# Altium PCB PCB1.PcbDoc
Units mm, origin at the board's own origin, x right, y up, seen from the top; angles counter-clockwise.
Board outline 100.84 x 68.96 mm, 2 copper layers (Top Layer, Bottom Layer); 67 components, 62 nets, 324 pads, 94 vias.
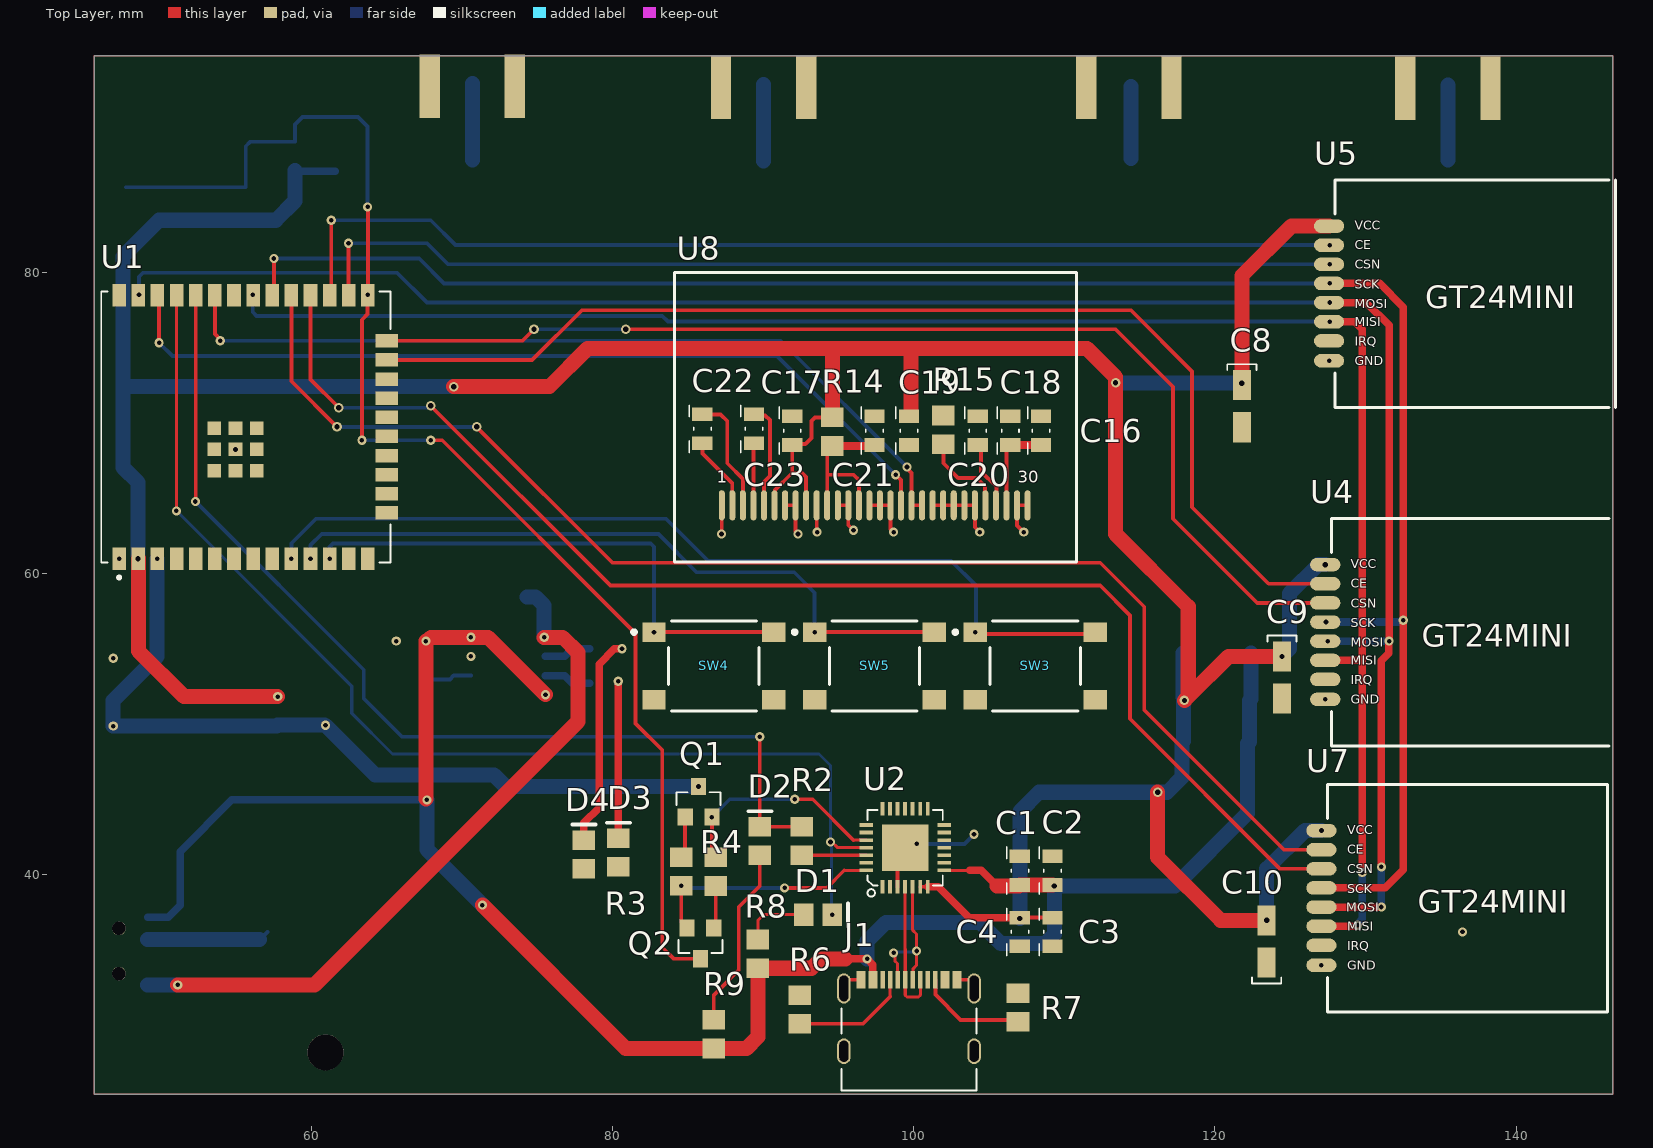
[diagram p0: Top Layer view]
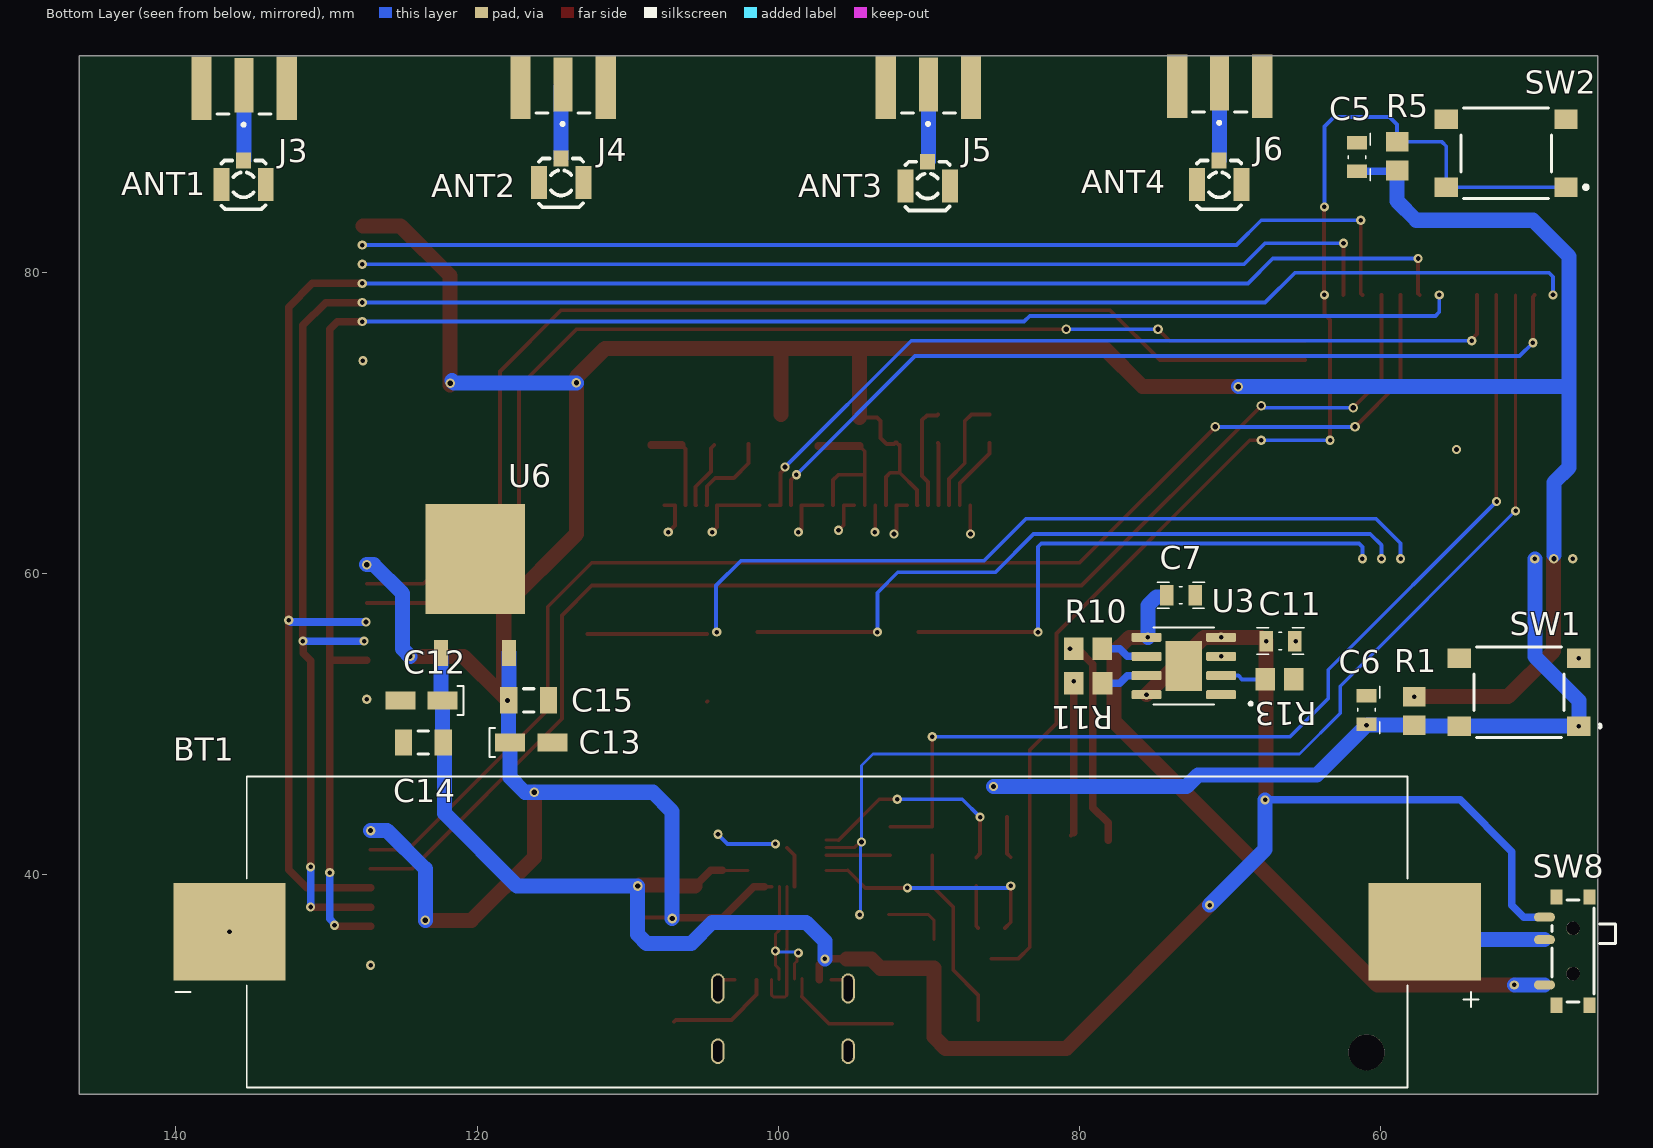
[diagram p1: Bottom Layer view, seen from below]

## Layer stack, top to bottom
Top Solder: solder mask 0.0102, Solder Resist, Dk 3.5
Top Layer: signal copper 0.0356
Dielectric 1: dielectric 0.32, FR-4, Dk 4.8
Bottom Layer: signal copper 0.0356
Bottom Solder: solder mask 0.0102, Solder Resist, Dk 3.5

## Board outline
146.431,94.361 146.431,25.4 45.593,25.4 45.593,94.361

## Design rules (kind name [scope] priority, off if disabled: settings)
AssemblyTestPointUsage [All] p0: scope1count=1 scope1_0_kind=Board scope1_0_value=Board scope2count=1 scope2_0_kind=Board scope2_0_value=Board commentlength=0
AssemblyTestpoint [All] p0: scope1count=1 scope1_0_kind=Board scope1_0_value=Board scope2count=1 scope2_0_kind=Board scope2_0_value=Board commentlength=0
Clearance [All] p0: scope1count=1 scope1_0_kind=Board scope1_0_value=Board scope2count=1 scope2_0_kind=Board scope2_0_value=Board commentlength=0 gap=0.254
Clearance [All] p1: gap=0.254 ignorepadtopadclearanceinfootprint=FALSE except(0.127: Arc-Arc Arc-Track Arc-SMDPad Arc-THPad Arc-Via Track-Track Track-SMDPad Track-THPad Track-Via SMDPad-SMDPad SMDPad-THPad SMDPad-Via THPad-THPad THPad-Via Via-Via)
ComponentClearance [All] p0: scope1count=1 scope1_0_kind=Board scope1_0_value=Board scope2count=1 scope2_0_kind=Board scope2_0_value=Board commentlength=0 gap=0.254 collisioncheckmode=3
DiffPairsRouting [All] p0: scope1count=1 scope1_0_kind=Board scope1_0_value=Board scope2count=1 scope2_0_kind=Board scope2_0_value=Board commentlength=0
FabricationTestPointUsage [All] p0: scope1count=1 scope1_0_kind=Board scope1_0_value=Board scope2count=1 scope2_0_kind=Board scope2_0_value=Board commentlength=0 valid=0 allowmultiple=FALSE
FabricationTestpoint [All] p0: scope1count=1 scope1_0_kind=Board scope1_0_value=Board scope2count=1 scope2_0_kind=Board scope2_0_value=Board commentlength=0 side=3 testpointundercomponent=TRUE minsize=1.016 maxsize=2.54 preferedsize=1.524 minholesize=0 maxholesize=1.016 preferedholesize=0.813 testpointgrid=0.025
FanoutControl Fanout_BGA [All] p0 off: scope1count=1 scope1_0_kind=Board scope1_0_value=Board scope2count=1 scope2_0_kind=Board scope2_0_value=Board commentlength=69 // Protel DXP Scope 1 Expression Was: IsBGA   Fanout_BGA (Default Rule)
FanoutControl Fanout_LCC [All] p0 off: scope1count=1 scope1_0_kind=Board scope1_0_value=Board scope2count=1 scope2_0_kind=Board scope2_0_value=Board commentlength=69 // Protel DXP Scope 1 Expression Was: IsLCC   Fanout_LCC (Default Rule)
FanoutControl Fanout_SOIC [All] p0 off: scope1count=1 scope1_0_kind=Board scope1_0_value=Board scope2count=1 scope2_0_kind=Board scope2_0_value=Board commentlength=71 // Protel DXP Scope 1 Expression Was: IsSOIC   Fanout_SOIC (Default Rule)
FanoutControl Fanout_Small [All] p0 off: scope1count=1 scope1_0_kind=Board scope1_0_value=Board scope2count=1 scope2_0_kind=Board scope2_0_value=Board commentlength=84 // Protel DXP Scope 1 Expression Was: (CompPinCount < 5)   Fanout_Small (Default Rule)
FanoutControl Fanout_Default [All] p0: scope1count=1 scope1_0_kind=Board scope1_0_value=Board scope2count=1 scope2_0_kind=Board scope2_0_value=Board commentlength=30 // Fanout_Default (Default Rule)
Height [All] p0: scope1count=1 scope1_0_kind=Board scope1_0_value=Board scope2count=1 scope2_0_kind=Board scope2_0_value=Board commentlength=0
HoleSize [All] p0: scope1count=1 scope1_0_kind=Board scope1_0_value=Board scope2count=1 scope2_0_kind=Board scope2_0_value=Board commentlength=0 absolutevalues=TRUE maxlimit=2.54 minlimit=0.025 maxpercent=80.000 minpercent=20.000
HoleToHoleClearance [All] p0: scope1count=1 scope1_0_kind=Board scope1_0_value=Board scope2count=1 scope2_0_kind=Board scope2_0_value=Board commentlength=0
LayerPairs [All] p0: scope1count=1 scope1_0_kind=Board scope1_0_value=Board scope2count=1 scope2_0_kind=Board scope2_0_value=Board commentlength=0 enforce=TRUE
MinimumSolderMaskSliver [All] p0: scope1count=1 scope1_0_kind=Board scope1_0_value=Board scope2count=1 scope2_0_kind=Board scope2_0_value=Board commentlength=0
MinimumSolderMaskSliver [All] p1: minsoldermaskwidth=0.15
NetAntennae [All] p0: scope1count=1 scope1_0_kind=Board scope1_0_value=Board scope2count=1 scope2_0_kind=Board scope2_0_value=Board commentlength=0
PasteMaskExpansion [All] p0: scope1count=1 scope1_0_kind=Board scope1_0_value=Board scope2count=1 scope2_0_kind=Board scope2_0_value=Board commentlength=0 expansion=0
PlaneClearance [All] p0: scope1count=1 scope1_0_kind=Board scope1_0_value=Board scope2count=1 scope2_0_kind=Board scope2_0_value=Board commentlength=0 clearance=0.508
PlaneConnect [All] p0: scope1count=1 scope1_0_kind=Board scope1_0_value=Board scope2count=1 scope2_0_kind=Board scope2_0_value=Board commentlength=0 planeconnectstyle=Relief reliefexpansion=0.508 reliefentries=4 reliefconductorwidth=0.254 reliefairgap=0.254
PolygonConnect [All] p0: scope1count=1 scope1_0_kind=Board scope1_0_value=Board scope2count=1 scope2_0_kind=Board scope2_0_value=Board commentlength=0 connectstyle=Relief reliefconductorwidth=0.254 reliefentries=4 polygonreliefangle="90 Angle"
PolygonConnect [All] p1: connectstyle=Relief reliefconductorwidth=0.254 reliefentries=4 polygonreliefangle="90 Angle" airgapwidth=0.254
RoutingCorners [All] p0: scope1count=1 scope1_0_kind=Board scope1_0_value=Board scope2count=1 scope2_0_kind=Board scope2_0_value=Board commentlength=0 cornerstyle=45-Degree minsetback=2.54 maxsetback=2.54
RoutingLayers [All] p0: scope1count=1 scope1_0_kind=Board scope1_0_value=Board scope2count=1 scope2_0_kind=Board scope2_0_value=Board commentlength=0 top layer=Automatic bottom layer=Automatic
RoutingPriority [All] p0: scope1count=1 scope1_0_kind=Board scope1_0_value=Board scope2count=1 scope2_0_kind=Board scope2_0_value=Board commentlength=0
RoutingTopology [All] p0: scope1count=1 scope1_0_kind=Board scope1_0_value=Board scope2count=1 scope2_0_kind=Board scope2_0_value=Board commentlength=0 topology=Shortest
RoutingVias [All] p0: scope1count=1 scope1_0_kind=Board scope1_0_value=Board scope2count=1 scope2_0_kind=Board scope2_0_value=Board commentlength=0 holewidth=0.711 width=1.27 viastyle="Through Hole" minholewidth=0.711 minwidth=1.27 maxholewidth=0.711 maxwidth=1.27
RoutingVias [All] p1: holewidth=0.711 width=1.27 viastyle="Through Hole" minholewidth=0.711 minwidth=1.27 maxholewidth=0.711 maxwidth=1.27
ShortCircuit [All] p0: scope1count=1 scope1_0_kind=Board scope1_0_value=Board scope2count=1 scope2_0_kind=Board scope2_0_value=Board commentlength=0 allowed=FALSE
SilkToBoardRegionClearance [All] p0: scope1count=1 scope1_0_kind=Board scope1_0_value=Board scope2count=1 scope2_0_kind=Board scope2_0_value=Board commentlength=0
SilkToSilkClearance [All] p0: scope1count=1 scope1_0_kind=Board scope1_0_value=Board scope2count=1 scope2_0_kind=Board scope2_0_value=Board commentlength=0
SilkToSilkClearance [All] p1: silktosilkclearance=0.15
SilkToSolderMaskClearance [All] p0 off: scope1count=1 scope1_0_kind=Board scope1_0_value=Board scope2count=1 scope2_0_kind=Board scope2_0_value=Board commentlength=44 // Protel DXP Scope 1 Expression Was: IsPad
SilkToSolderMaskClearance [IsPad] p1: minsilkscreentomaskgap=0.15 clearancetoexposedcopper=TRUE
SolderMaskExpansion [All] p0: scope1count=1 scope1_0_kind=Board scope1_0_value=Board scope2count=1 scope2_0_kind=Board scope2_0_value=Board commentlength=0 expansion=0
SolderMaskExpansion [All] p1: expansion=0 istentingtop=FALSE
SupplyNets "Schematic Supply Nets_2" [All] p0: scope1count=1 scope1_0_kind=Net scope1_0_value=3V3 scope2count=1 scope2_0_kind=Board scope2_0_value=Board commentlength=0 voltage=0.000
SupplyNets "Schematic Supply Nets_1" [All] p0: scope1count=1 scope1_0_kind=Net scope1_0_value=GND scope2count=1 scope2_0_kind=Board scope2_0_value=Board commentlength=0 voltage=0.000
SupplyNets "Schematic Supply Nets" [All] p0: scope1count=1 scope1_0_kind=Net scope1_0_value=+5 scope2count=1 scope2_0_kind=Board scope2_0_value=Board commentlength=0 voltage=0.000
SupplyNets "Schematic Supply Nets_2" [InNet('3V3')] p1: voltage=0.000
SupplyNets "Schematic Supply Nets_1" [InNet('GND')] p2: voltage=0.000
SupplyNets "Schematic Supply Nets" [InNet('+5')] p3: voltage=0.000
UnRoutedNet [All] p0: scope1count=1 scope1_0_kind=Board scope1_0_value=Board scope2count=1 scope2_0_kind=Board scope2_0_value=Board commentlength=0
UnpouredPolygon [All] p0: scope1count=1 scope1_0_kind=Board scope1_0_value=Board scope2count=1 scope2_0_kind=Board scope2_0_value=Board commentlength=0
Width Width_2 [All] p0: scope1count=1 scope1_0_kind=Board scope1_0_value=Board scope2count=1 scope2_0_kind=Board scope2_0_value=Board commentlength=0 maxlimit=1 minlimit=0.2 preferedwidth=0.254
Width Width_1 [All] p0: scope1count=1 scope1_0_kind=Net scope1_0_value=+3V3 scope2count=1 scope2_0_kind=Board scope2_0_value=Board commentlength=0 maxlimit=1 minlimit=0.2 preferedwidth=1
Width [All] p0: scope1count=1 scope1_0_kind=Board scope1_0_value=Board scope2count=1 scope2_0_kind=Board scope2_0_value=Board commentlength=0 maxlimit=1 minlimit=0.2 preferedwidth=0.5
Width Width_2 [All] p1: maxlimit=1 minlimit=0.2 preferedwidth=0.254 minimp=50.000000 maximp=50.000000 favimp=50.000000
Width Width_1 [InNet('+3V3')] p2: maxlimit=1 minlimit=0.2 preferedwidth=1 minimp=50.000000 maximp=50.000000 favimp=50.000000
Width [All] p3: maxlimit=1 minlimit=0.2 preferedwidth=0.5 minimp=50.000000 maximp=50.000000 favimp=50.000000
27 further rules are at their usual default settings.

## Classes and differential pairs
component class Sheet2: C16 C17 C18 C19 C20 C21 C22 C23 R14 R15 U8
component class Sheet1: ANT1 ANT2 ANT3 ANT4 BT1 C1 C2 C3 C4 C5 C6 C7 C8 C9 C10 C11 C12 C13 C14 C15 D1 D2 D3 D4 J1 J3 J4 J5 J6 Q1 Q2 R1 R2 R3 R4 R5 R6 R7 R8 R9 R10 R11 R13 SW1 SW2 SW3 SW4 SW5 SW8 U1 U2 U3 U4 U5 U6 U7

## Components (designator, comment, footprint, x,y, rotation, side; value= is the part's Value field where it differs from the comment)
ANT1 "" "U.FL SMD" 135.509,86.614 r0 bottom
ANT2 "ANT" "U.FL SMD" 114.427,86.741 r0 bottom
ANT3 "ANT" "U.FL SMD" 90.092,86.525 r0 bottom
ANT4 "ANT" "U.FL SMD" 70.739,86.614 r0 bottom
BT1 "1042 Bat" BAT_1042 96.774,36.195 r180 bottom
C1 "10uF" CAP0805 107.061,40.259 r270 top
C2 "100nF, 50V" CAP0805 109.22,40.259 r270 top
C3 "10uF" CAP0805 109.22,36.195 r90 top
C4 "100nF, 50V" CAP0805 107.061,36.195 r90 top
C5 "100nF, 50V" CAP0805 61.595,87.63 r270 bottom
C6 "100nF, 50V" CAP0805 60.96,50.927 r270 bottom
C7 "100nF, 50V" CAP0805 73.279,58.547 r0 bottom
C8 "10uF" "TAN 1206 (3216X18L) SIZE A" 116.332,77.834 r270 top
C9 "10uF" "TAN 1206 (3216X18L) SIZE A" 118.999,59.817 r270 top
C10 "10uF" "TAN 1206 (3216X18L) SIZE A" 128.905,28.829 r90 top
C11 "100nF" CAP0805 66.675,55.499 r0 bottom
C12 "2.2uF" "TAN 1206 (3216X18L) SIZE A" 116.961,57.023 r0 bottom
C13 "2.2uF" "TAN 1206 (3216X18L) SIZE A" 123.146,43.307 r180 bottom
C14 "10uF, 50V" "CAP 1206 (3216X15L)" 123.571,48.768 r180 bottom
C15 "10uF, 50V" "CAP 1206 (3216X15L)" 116.586,51.562 r0 bottom
C16 "10uF" CAP0805 108.458,69.469 r270 top
C17 "10uF" CAP0805 91.948,69.469 r90 top
C18 "100nF, 50V" CAP0805 106.426,69.469 r270 top
C19 "100nF, 50V" CAP0805 99.695,69.469 r270 top
C20 "2.2uF, 50V" CAP0805 104.267,69.469 r90 top
C21 "2.2uF, 50V" CAP0805 97.409,69.469 r90 top
C22 "1uF, 50V" CAP0805 85.979,69.596 r90 top
C23 "1uF, 50V" CAP0805 89.408,69.596 r90 top
D1 "0805 LED" L0805 94.61,37.338 r0 top
D2 "0805 LED" L0805 89.789,43.18 r90 top
D3 "0805 LED" L0805 80.391,42.413 r90 top
D4 "0805 LED" L0805 78.105,42.286 r90 top
J1 "TYPE-C-31-M-12" HRO_TYPE-C-31-M-12 99.699,28.27 r0 top
J3 "SMA-J-P-H-ST-EM1" SAMTEC_SMA-J-P-H-ST-EM1 135.478,92.402 r0 bottom
J4 "SMA-J-P-H-ST-EM1" SAMTEC_SMA-J-P-H-ST-EM1 114.3,92.456 r0 bottom
J5 "SMA-J-P-H-ST-EM1" SAMTEC_SMA-J-P-H-ST-EM1 90.043,92.456 r0 bottom
J6 "SMA-J-P-H-ST-EM1" SAMTEC_SMA-J-P-H-ST-EM1 70.708,92.529 r0 bottom
Q1 "SMD-TRANSISTORS-NPN-25V-500MW(SOT-23)" SOT-23 85.725,44.831 r0 top
Q2 "SMD-TRANSISTORS-NPN-25V-500MW(SOT-23)" SOT-23 85.852,35.433 r180 top
R1 "4k7 OHM" "RES 0805" 57.785,49.916 r180 bottom
R2 "470 OHM" "RES 0805" 92.583,41.28 r0 top
R3 "12K OHM" "RES 0805" 84.582,39.248 r0 top
R4 "12K OHM" "RES 0805" 86.868,39.243 r0 top
R5 "4k7 OHM" "RES 0805" 58.928,88.641 r0 bottom
R6 "5.1K OHM" "RES 0805" 92.456,31.999 r180 top
R7 "5.1K OHM" "RES 0805" 106.934,32.126 r180 top
R8 "1K OHM" "RES 0805" 89.662,33.787 r0 top
R9 "1K OHM" "RES 0805" 86.741,28.453 r0 top
R10 "1K OHM" "RES 0805" 78.491,54.991 r90 bottom
R11 "1K OHM" "RES 0805" 80.386,52.705 r270 bottom
R13 "1K OHM" "RES 0805" 65.786,52.959 r90 bottom
R14 "10K OHM" "RES 0805" 94.615,70.353 r180 top
R15 "390K OHM" "RES 0805" 101.981,68.58 r0 top
SW1 "PTS645SH50SMTR92LFS" FP-PTS645SH50SMTR92LFS-MFG 50.838,52.106 r0 bottom
SW2 "PTS645SH50SMTR92LFS" FP-PTS645SH50SMTR92LFS-MFG 51.689,87.884 r0 bottom
SW3 "PTS645SH50SMTR92LFS" FP-PTS645SH50SMTR92LFS-MFG 108.077,53.848 r0 top
SW4 "PTS645SH50SMTR92LFS" FP-PTS645SH50SMTR92LFS-MFG 86.741,53.848 r0 top
SW5 "PTS645SH50SMTR92LFS" FP-PTS645SH50SMTR92LFS-MFG 97.409,53.848 r0 top
SW8 "SWSLIDT_SPDT_MSS3" SWSLIDT_SPDT_MSS3 47.244,34.925 r270 bottom
U1 "ESP32-WROOM-32U" XCVR_ESP32-WROOM-32U 55.674,69.723 r90 top
U2 "INTERFACE-CP2102-GMR(QFN28)" QFN28G_0.5-5X5MM 99.441,41.783 r90 top
U3 "TP4056" SOP127P600X175-9N 73.09,53.848 r0 bottom
U4 "nRF24L01" NRF24L01_GT24MINI_MS#1 137.033,56.134 r0 top
U5 "nRF24L01" NRF24L01_GT24MINI_MS#1 137.287,78.613 r0 top
U6 "LF33CDT-TR" TO228P972X240-3N 120.142,60.808 r180 bottom
U7 "nRF24L01" NRF24L01_GT24MINI_MS#2 136.779,38.481 r0 top
U8 "OLED 0.96¨" OLED_0.96IN_WHITE_SSD1306 97.419,64.516 r0 top

## Footprints (in the part's own frame and the unit in brackets; to place one, negate y for a bottom-side part, rotate by r counter-clockwise, add the part's x,y. Pads: shape width x height; smd on the part's side, far side on the other; paste and mask are expansions set on the pad)
BAT_1042 [mm]
  rect 7.46x6.47 smd: N(-39.67,0) P(39.67,0)
  round 0 all layers, no hole mask+0: ""(-27.6,-8)
  round 0 all layers, no hole: ""(27.6,8)
  round 2.39 hole 2.39 unplated: ""(35.82,-8)
  silkscreen extent -43.25,-10.33 43.25,10.33
CAP0805 [mm] "Chip Capacitor, 2-Leads, Body 2/00x1/25mm, IPC Medium Density DESIGNER:ABBAS BASEREH"
  rect 0.9x1.35 smd: 1(-0.95,0) 2(0.95,0)
  silkscreen extent -1.58,-0.87 1.58,0.58
"CAP 1206 (3216X15L)" [mm] "Chip Capacitor, 2-Leads, Body 3.2x1.6mm, IPC High Density"
  rect 1.15x1.75 smd: 1(-1.325,0) 2(1.325,0)
  silkscreen extent -0.35,-0.77 0.35,0.77
FP-PTS645SH50SMTR92LFS-MFG [mm]
  rect 1.55x1.3 smd paste+0 mask+0: 1(-3.975,2.25) 2(3.975,2.25) 3(-3.975,-2.25) 4(3.975,-2.25)
  silkscreen extent -5.43,-3 3,3
HRO_TYPE-C-31-M-12 [mm]
  rect 0.6x1.14 smd mask+0.05: A1_B12(-3.2,4.75) A4_B9(-2.4,4.75) B1_A12(3.2,4.75) B4_A9(2.4,4.75)
  rect 0.3x1.14 smd mask+0.05: A5(-1.25,4.75) A6(-0.25,4.75) A7(0.25,4.75) A8(1.25,4.75) B5(1.75,4.75) B6(0.75,4.75) B7(-0.75,4.75) B8(-1.75,4.75)
  oval 0.9x2 hole 0.6 slot 1.7 at 90 deg: S1(-4.325,4.17) S2(4.325,4.17)
  oval 0.9x1.7 hole 0.6 slot 1.4 at 90 deg: S3(-4.325,0) S4(4.325,0)
  silkscreen extent -4.47,-2.6 4.47,2.85
L0805 [mm] "Body 2.0x1.3mm, IPC High Density"
  rect 1.3x1.5 smd: A(-1.9,0) K(0,0)
  silkscreen extent 1.03,-0.78 1.03,0.75
NRF24L01_GT24MINI_MS#1 [mm] "2.4GHz Transceiver MODULE, SMD"
  oval 2x0.9 smd mask+0: 1(-9.7,4.44) 2(-9.7,3.17) 3(-9.7,1.9) 4(-9.7,0.63) 5(-9.7,-0.64) 6(-9.7,-1.91) 7(-9.7,-3.18) 8(-9.7,-4.5)
  silkscreen extent -9.3,-7.6 9.15,7.5
NRF24L01_GT24MINI_MS#2 [mm] "2.4GHz Transceiver MODULE, SMD"
  oval 2x0.9 smd mask+0.1: 1(-9.7,4.44) 2(-9.7,3.17) 3(-9.7,1.9) 4(-9.7,0.63) 5(-9.7,-0.64) 6(-9.7,-1.91) 7(-9.7,-3.18) 8(-9.7,-4.5)
  silkscreen extent -9.3,-7.6 9.3,7.5
OLED_0.96IN_WHITE_SSD1306 [mm] "OLED, 0.96IN, Monochrome white, SSD1306"
  oval 0.4x2 smd: 1(-10.15,0) 2(-9.45,0) 3(-8.75,0) 4(-8.05,0) 5(-7.35,0) 6(-6.65,0) 7(-5.95,0) 8(-5.25,0) 9(-4.55,0) 10(-3.85,0) 11(-3.15,0) 12(-2.45,0) 13(-1.75,0) 14(-1.05,0) 15(-0.35,0) 16(0.35,0) 17(1.05,0) 18(1.75,0) 19(2.45,0) 20(3.15,0) 21(3.85,0) 22(4.55,0) 23(5.25,0) 24(5.95,0) 25(6.65,0) 26(7.35,0) 27(8.05,0) 28(8.75,0) 29(9.45,0) 30(10.15,0)
  silkscreen extent -13.3,-3.75 13.4,15.45
QFN28G_0.5-5X5MM [mm]
  rect 0.9x0.254 smd: 1(-2.59,1.5) 2(-2.59,1) 3(-2.59,0.5) 4(-2.59,0) 5(-2.59,-0.5) 6(-2.59,-1) 7(-2.59,-1.5) 15(2.59,-1.5) 16(2.59,-1) 17(2.59,-0.5) 18(2.59,0) 19(2.59,0.5) 20(2.59,1) 21(2.59,1.5)
  rect 0.254x0.9 smd: 8(-1.5,-2.59) 9(-1,-2.59) 10(-0.5,-2.59) 11(0,-2.59) 12(0.5,-2.59) 13(1,-2.59) 14(1.5,-2.59) 22(1.5,2.59) 23(1,2.59) 24(0.5,2.59) 25(0,2.59) 26(-0.5,2.59) 27(-1,2.59) 28(-1.5,2.59)
  rect 3.1x3.1 smd paste-3: 29(0,0)
  silkscreen extent -3.25,-2.5 2.5,2.5
"RES 0805" [mm] "RES 0805"
  rect 1.5x1.3 smd: 1(0,0) 2(0,1.9)
SAMTEC_SMA-J-P-H-ST-EM1 [mm]
  rect 1.27x3.6 smd: 1(0,0)
  rect 1.35x4.2 smd: 2_1(-2.825,0.2) 3_1(2.825,0.2)
  rect 1.35x4.2 smd far side: 2_2(-2.825,0.2) 3_2(2.825,0.2)
  silkscreen extent -1.8,1.91 1.8,2.72
SOP127P600X175-9N [mm]
  rrect25% 1.97x0.6 smd: 1(-2.475,1.905) 2(-2.475,0.635) 3(-2.475,-0.635) 4(-2.475,-1.905) 5(2.475,-1.905) 6(2.475,-0.635) 7(2.475,0.635) 8(2.475,1.905)
  rect 2.413x3.302 smd paste-3: 9(0,0)
  silkscreen extent -4.54,-2.55 2,2.6
SOT-23 [mil]
  rect 40x45 smd: 1(-35,-40) 2(35,-40) 3(0,40)
  silkscreen extent -58,-9 58,25
SWSLIDT_SPDT_MSS3 [mm] "Switch, Slide, SPDT,"
  oval 0.6x1.4 smd: 1(2.25,-1.9) 2(-0.75,-1.9) 3(-2.25,-1.9)
  rect 1x0.8 smd: EP(-3.6,-1.1) EP(-3.6,1.1) EP(3.6,-1.1) EP(3.6,1.1)
  round 0.9 hole 0.9 unplated: ""(-1.5,0) ""(1.5,0)
  silkscreen extent -3.4,-1.4 3.4,2.8
"TAN 1206 (3216X18L) SIZE A" [mil]
  rect 78.7x47.2 smd: 1(210,215) 2(320.22,215)
  silkscreen extent 156,177 171,253
TO228P972X240-3N [mil]
  rect 37x67 smd: 1(-89,-240) 3(89,-240)
  rect 260x288 smd: 2(0,6)
"U.FL SMD" [mm] "U.FL Antenna-Design:Ali Hafizi"
  rect 1x1.05 smd: 1(0.002,-0.8)
  rect 1.05x2.2 smd: 2(-1.475,0.8) 2(1.475,0.8)
  silkscreen extent -1.47,-0.8 1.47,2.44
XCVR_ESP32-WROOM-32U [mm]
  rect 1.5x0.9 smd: 1(-8.75,8.41) 2(-8.75,7.14) 3(-8.75,5.87) 4(-8.75,4.6) 5(-8.75,3.33) 6(-8.75,2.06) 7(-8.75,0.79) 8(-8.75,-0.48) 9(-8.75,-1.75) 10(-8.75,-3.02) 11(-8.75,-4.29) 12(-8.75,-5.56) 13(-8.75,-6.83) 14(-8.75,-8.1) 25(8.75,-8.1) 26(8.75,-6.83) 27(8.75,-5.56) 28(8.75,-4.29) 29(8.75,-3.02) 30(8.75,-1.75) 31(8.75,-0.48) 32(8.75,0.79) 33(8.75,2.06) 34(8.75,3.33) 35(8.75,4.6) 36(8.75,5.87) 37(8.75,7.14) 38(8.75,8.41)
  rect 0.9x1.5 smd: 15(-5.715,-9.35) 16(-4.445,-9.35) 17(-3.175,-9.35) 18(-1.905,-9.35) 19(-0.635,-9.35) 20(0.635,-9.35) 21(1.905,-9.35) 22(3.175,-9.35) 23(4.445,-9.35) 24(5.715,-9.35)
  rect 0.9x0.9 smd: 39_1(-2.9,2.09) 39_2(-1.5,2.09) 39_3(-0.1,2.09) 39_4(-2.9,0.69) 39_5(-1.5,0.69) 39_6(-0.1,0.69) 39_7(-2.9,-0.71) 39_8(-1.5,-0.71) 39_9(-0.1,-0.71)
  round 0 all layers, no hole mask+0: 40_1(-2.2,2.09) 40_2(-0.8,2.09) 40_3(-2.9,1.39) 40_4(-1.5,1.39) 40_5(-0.1,1.39) 40_6(-2.2,0.69) 40_7(-0.8,0.69) 40_8(-2.9,-0.01) 40_9(-1.5,-0.01) 40_10(-0.1,-0.01) 40_11(-2.2,-0.71) 40_12(-0.8,-0.71)
  silkscreen extent -10.1,-9.6 9,9.6

## Part data
ANT1: library part ANT, "U.FL Antenna"
ANT2 ANT3 ANT4: "U.FL Antenna"
BT1: library part 1042
C1 C3 C16 C17: library part C0805_10UF, "CAP CER 10UF 0805"
C2 C4 C7 C18 C19: library part "C0805 100nF", "CAP CER 0.1UF 0805"
C5 C6: library part C0805, "CAP CER 0.1UF 0805"
C8 C9: library part "10uF Capacitor Tantalum SMD", "Capacitor Tantalum SMD"
C10: library part "Capacitor Tantalum SMD", "Capacitor Tantalum SMD"
C11: library part C0805_100nF, "CAP CER 100nF 0805"
C12 C13: library part "2.2uF Capacitor Tantalum SMD", "Capacitor Tantalum SMD"
C14 C15: library part "CAP 10uF (3216X15L)", "CAP CER 10uF 0805, 'CAP 1206 (3216X15L)"
C20 C21: library part "C0805 2.2uF", "CAP CER 2.2UF 0805"
C22 C23: library part "C0805 1uF", "CAP CER 1UF 0805"
D1 D2 D3 D4: library part "LED 0805", "LED RED 0805 SMD"
J1: "USB Connectors 24 Receptacle 1 8.94*7.3mm RoHS"
Q1 Q2: "Bipolar (BJT) Transistor NPN 25 V 500 mA 150MHz 300 mW Surface Mount SOT-23"
R1: library part "RES 0805", "RES 4.7K OHM 1% 1/16W 0805"
R2: library part "RES 0805 470 OHM", "RES 470 OHM 1% 1/16W 0805"
R3 R4: library part "RES 0805 12K OHM", "RES 12K OHM 1% 1/16W 0805"
R5: library part "RES 0805 4.7K OHM", "RES 4.7K OHM 1% 1/16W 0805"
R6 R7: library part "RES 0805 5.1K OHM", "RES 5.1K OHM 1% 1/16W 0805"
R8 R9: library part "RES 0805 1K OHM", "RES 4.7K OHM 1% 1/16W 0805"
R10 R11 R13: library part "RES 0805 1K OHM", "RES 1K OHM 1% 1/16W 0805"
R14: library part "RES 10K OHM", "RES 10K OHM 1% 1/16W 0805"
R15: library part "RES 0805 390K OHM_1", "RES 390K OHM 1% 1/16W 0805"
SW1 SW2 SW3 SW4 SW5: "SWITCH TACTILE SPST-NO 0.05A 12V"
SW8: library part SlideSwitch
U1: "Bluetooth, WiFi 802.11b/g/n, Bluetooth v4.2 +EDR, Class 1, 2 and 3 Transceiver Module 2.4GHz ~ 2.5GHz Antenna Not Included, U.FL Surface Mount"
U2: "USB Bridge, USB to UART USB 2.0 UART Interface 28-QFN (5x5)"
U3: "Complete single cell Li-Ion battery with a constant current / constant voltage linear charger"
U4 U5 U7: library part nRFL024L01, "nRF24L01, 2.4GHz Transceiver MODULE, SMD"
U6: "Linear Voltage Regulator IC Positive Fixed 1 Output 500mA DPAK"
U8: "By Prince"

## Via types
v1: diameter 0.61, hole 0.305, Top Layer to Bottom Layer, 76 vias
v2: diameter 0.635, hole 0.354, Top Layer to Bottom Layer, 18 vias

## Nets (pads, with @x,y where several pads share a name; then routed paths per layer and width w, separated by ;. In a path a pad name is that pad's centre, name@x,y a point inside that pad or via, vN(x,y) a via of type N, cw(c..) or ccw(c..) an arc to the next point about the centre after c; other vN are vias at no path point)
3V3: C3.2 C4.2 C5.2 C8.1 C9.1 C10.2 C13.1 C15.2 C17.1 C19.1 R1.2 R5.2 R14.1 U1.2 U2.6 U2.7 U4.1 U5.1 U6.3 U7.1 U8.6 U8.9 | length 262.3
  Top Layer w0.254: U8.6 90.797,64.544 90.797,65.524 91.948,66.675 ; U8.9 92.869,66.389 92.583,66.675 91.948,66.675 ; R14.1 93.467,70.353 93.218,70.104 93.218,68.983 92.815,68.58 92.329,68.58 92.202,68.707 92.014,68.519 C17.1 91.948,66.675 ; C19.1 C19.1@99.822,70.546 ; U2.6 U2.7 ; C4.2 C3.2
  Top Layer w0.5: U2.7 101.65,39.193 103.698,37.145 C4.2
  Top Layer w1: U1.2 48.534,54.844 51.562,51.816 v1(57.785,51.816) ; v2(69.469,72.39) 75.819,72.39 78.359,74.93 94.615,74.93 ; R14.1 94.615,74.93 ; C19.1@99.822,70.546 99.822,74.93 ; v2(116.205,45.466) 116.205,41.148 120.39,36.963 v2(123.444,36.963) ; v2(117.983,51.562) 118.237,51.816 ; C8.1@121.793,72.517 v2(121.793,72.622) 121.793,79.756 125.09,83.053 U5.1 ; v2(124.46,54.483) 120.904,54.483 118.237,51.816 ; 94.615,74.93 99.822,74.93 ; 99.822,74.93 111.506,74.93 113.411,73.025 v2(113.411,72.644) 113.411,62.611 118.237,57.785 118.237,51.816
  Bottom Layer w0.254: v2@48.387,61.087 v2@48.514,61.214 ; R5.2 R5.2@58.989,86.68
  Bottom Layer w0.5: R5.2@58.989,86.68 C5.2
  Bottom Layer w1: v2@48.514,61.214 48.514,66.04 47.52,67.034 47.52,72.39 ; R5.2 58.928,84.709 57.658,83.439 49.911,83.439 47.52,81.048 47.52,72.39 ; v2(69.469,72.39) 47.52,72.39 ; v2(107.061,37.084) 107.061,44.196 108.331,45.466 v2(116.205,45.466) 116.84,45.466 117.812,46.438 C13.1 117.911,48.867 C15.2 ; v2(113.411,72.644) 121.539,72.644 v2@121.684,72.789 ; C15.2@117.881,51.786 U6.3 ; v2(123.444,36.963) 123.444,40.386 125.979,42.921 v2(127.079,42.921) ; v2(124.46,54.483) 124.968,54.991 124.968,58.674 126.868,60.574 v2(127.333,60.574)
  other v2: 48.514,60.96
+5: C1.2 C2.2 C11.2 C12.1 C14.2 J1.A4_B9 R8.1 R9.1 SW8.3 U2.8 U3.4 U3.8 U6.1 | length 139.9
  Top Layer w0.2: U2.8 103.735,40.283
  Top Layer w0.254: R8.1 R8.1@89.667,33.782 ; C1.2@106.995,39.243 C1.2
  Top Layer w0.5: 95.481,34.4 v1(96.918,34.4) 97.299,34.019 J1.A4_B9 ; 103.735,40.283 104.497,40.283 105.537,39.243
  Top Layer w1: v1@67.625,45.024 v1(67.625,55.499) ; v1@67.698,55.499 67.952,55.753 v1(70.615,55.753) 71.755,55.753 v1(75.565,51.943) ; v1(71.374,37.973) 80.894,28.453 R9.1 ; R9.1@86.746,28.448 88.9,28.448 89.662,29.21 R8.1 ; R8.1@89.667,33.782 93.218,33.782 93.836,34.4 95.481,34.4 ; 105.537,39.243 C1.2@106.995,39.243 ; C1.2 C2.2
  Bottom Layer w0.254: C14.2@122.174,48.696 C14.2 C14.2@122.295,48.817 ; C12.1 C12.1@122.403,51.669
  Bottom Layer w0.5: SW8.3 50.51,37.175 51.308,37.973 51.308,41.529 54.737,44.958 v1(67.691,44.958)
  Bottom Layer w1: v1(67.691,44.958) 67.691,41.656 v1(71.374,37.973) ; v1(96.918,34.4) 96.918,35.577 98.171,36.83 104.394,36.83 105.791,35.433 108.761,35.433 109.347,36.019 v2(109.347,39.243) 117.348,39.243 122.174,44.069 C14.2@122.174,48.696 ; C14.2@122.295,48.817 C12.1 ; C12.1@122.403,51.669 U6.1
BAT: C7.2 SW8.1 U3.5 | length 46.7
  Top Layer w1: v1(51.145,32.675) 60.232,32.675 77.722,50.165 77.722,54.737 76.706,55.753 v1(75.48,55.753)
  Bottom Layer w0.254: C7.2 C7.2@74.337,58.439
  Bottom Layer w1: SW8.1 v1(51.145,32.675) ; C7.2@74.337,58.439 74.911,58.439 75.48,57.87 v1(75.48,55.753)
CC1: J1.A5 R6.2 | length 7.9
  Top Layer w0.2: 98.449,31.901 98.449,32.74 J1.A5 J1.A5@98.449,33.089
  Top Layer w0.254: R6.2 96.647,30.099 98.449,31.901
CC2: J1.B5 R7.2 | length 7.2
  Top Layer w0.254: J1.B5 101.449,32.028 103.124,30.353 106.807,30.353 R7.2
CTS: U2.23
D+: J1.A6 J1.B6 U2.4 | length 9.3
  Top Layer w0.2: U2.4 99.441,35.052 99.449,35.044 J1.A6 99.449,31.996 99.568,31.877 100.332,31.877 100.449,31.994 J1.B6
D-: J1.A7 J1.B7 U2.5 | length 9.8
  Top Layer w0.2: v1(98.679,34.798) 98.757,34.72 98.757,34.269 98.933,34.093 J1.B7@98.933,33.052 ; U2.5 99.945,39.189 99.945,36.31 100.203,36.052 v1(100.203,34.925) 100.203,33.972 99.949,33.718 J1.A7
  Bottom Layer w0.2: v1(98.679,34.798) 98.742,34.861 100.139,34.861 v1(100.203,34.925)
DCD: U2.1
DSR: U2.27
DTR: Q2.2 R3.1 U2.28 | length 15.8
  Top Layer w0.2: 95.401,40.283 U2.28
  Top Layer w0.254: v1(84.582,39.248) 84.582,36.83 Q2.2 ; v1(91.44,39.116) 94.234,39.116 95.401,40.283
  Bottom Layer w0.254: v1(84.582,39.248) 84.678,39.248 84.81,39.116 v1(91.44,39.116)
GND: ANT1.2 ANT2.2 ANT3.2 ANT4.2 BT1.N C1.1 C2.1 C3.1 C4.1 C5.1 C6.1 C7.1 C8.2 C9.2 C10.1 C11.1 C12.2 C13.2 C14.1 C15.1 C16.1 C17.2 C18.1 C19.2 C20.2 C21.2 D3.A D4.A J1.A1_B12 J1.B1_A12 J1.S1 J1.S2 J1.S3 J1.S4 J3.2_1 J3.2_2 J3.3_1 J3.3_2 J4.2_1 J4.2_2 J4.3_1 J4.3_2 J5.2_1 J5.2_2 J5.3_1 J5.3_2 J6.2_1 J6.2_2 J6.3_1 J6.3_2 R6.1 R7.1 R13.1 R15.2 SW1.3 SW1.4 SW2.3 SW2.4 SW3.3 SW3.4 SW4.3 SW4.4 SW5.3 SW5.4 U1.1 U1.15 U1.38 U1.39_1 U1.39_2 U1.39_3 U1.39_4 U1.39_5 U1.39_6 U1.39_7 U1.39_8 U1.39_9 U2.3 U2.29 U3.3 U4.8 U5.8 U6.2 U7.8 U8.1 U8.7 U8.8 U8.10 U8.12 U8.13 U8.15 U8.16 U8.17 U8.21 U8.22 U8.23 U8.24 U8.25 U8.29 U8.30 | length 29.3
  Top Layer w0.254: v1(87.249,62.611) 87.269,62.631 U8.1 ; U8.7 U8.8 92.169,62.771 v1(92.329,62.611) ; U8.10 93.569,62.768 v1(93.599,62.738) ; U8.12 U8.13 95.669,63.208 v1@95.885,62.992 ; J1.S1 95.374,32.722 95.672,33.02 J1.A1_B12 ; U8.15 U8.16 U8.17 98.469,62.948 v1(98.679,62.738) ; U2.3 98.941,41.283 U2.29 ; U8.21 U8.22 U8.23 U8.24 U8.25 104.069,63.063 v1(104.394,62.738) ; J1.B1_A12 103.726,33.02 104.024,32.722 J1.S2 ; SW3.3@104.701,51.507 SW3.3@104.737,51.471 ; v1(107.315,62.738) 106.869,63.184 U8.29 U8.30
  Bottom Layer w0.254: v1(100.203,42.037) 103.378,42.037 v1(104.013,42.672)
  other v1: 127.079,33.981 136.444,36.195 127.333,51.634 46.863,54.356 70.612,54.483 65.659,55.499 47.264,60.973 96.012,62.865 54.984,68.223 127.587,74.113
GPIO0: Q2.3 R5.1 SW2.1 SW2.2 U1.25 | length 89.4
  Top Layer w0.254: v1(63.373,68.834) 63.373,76.835 63.754,77.216 63.754,78.453 U1.25 63.774,84.308 v1(63.754,84.328) ; v1(67.945,68.834) 68.707,68.834 81.534,56.007 81.534,50.038 83.312,48.26 83.312,35.179 84.074,34.417 Q2.3
  Bottom Layer w0.254: SW2.1 SW2.2 55.664,88.354 55.956,88.646 58.928,88.646 58.928,89.789 59.436,90.297 63.119,90.297 63.754,89.662 v1(63.754,84.328) ; v1(63.373,68.834) v1(67.945,68.834)
  other v1: 63.754,78.486
IO2: U1.24 U4.3 | length 75.3
  Top Layer w0.254: U1.24 74.041,75.438 v2(74.803,76.2) ; v2(80.899,76.2) 113.411,76.2 117.221,72.39 117.221,63.627 122.814,58.034 U4.3
  Bottom Layer w0.254: v2(74.803,76.2) v2(80.899,76.2)
IO4: U1.26 U5.3 | length 69.2
  Top Layer w0.254: v1(62.484,81.915) 62.484,78.493 U1.26
  Bottom Layer w0.254: v1(62.484,81.915) 67.691,81.915 69.088,80.518 v1(127.635,80.518)
IO5: U1.29 U7.2 | length 91
  Top Layer w0.254: U1.29 58.694,72.751 v2(61.722,69.723) ; v2(70.993,69.723) 80.01,60.706 112.395,60.706 115.316,57.785 115.316,50.927 124.592,41.651 U7.2
  Bottom Layer w0.254: v2(61.722,69.723) v2(70.993,69.723)
IO12: U1.14
IO13: U1.16
IO14: U1.13
IO15: U1.23 U4.2 | length 76.5
  Top Layer w0.254: U1.23 74.676,74.168 77.978,77.47 114.427,77.47 118.491,73.406 118.491,64.389 123.576,59.304 U4.2
IO16: U1.27 U5.2 | length 72
  Top Layer w0.254: U1.27 61.341,78.58 v1(61.341,83.439)
  Bottom Layer w0.254: v1(61.341,83.439) 67.945,83.439 69.596,81.788 v1(127.635,81.788)
IO17: U1.28 U7.3 | length 90.3
  Top Layer w0.254: U1.28 59.964,72.878 v2(61.849,70.993) ; v2(67.945,71.12) 79.883,59.182 112.395,59.182 114.37,57.207 114.37,50.349 124.338,40.381 U7.3
  Bottom Layer w0.254: v2(61.849,70.993) 67.715,70.993 67.842,71.12 v2(67.945,71.12)
IO18: U1.30 U4.4 U5.4 U7.4 | length 127.3
  Top Layer w0.254: U1.30 57.531,78.58 v1(57.531,80.899)
  Top Layer w0.5: U7.4 131.313,39.111 132.512,40.31 132.512,77.673 130.942,79.243 U5.4
  Bottom Layer w0.254: v1(57.531,80.899) 67.183,80.899 68.834,79.248 v1(127.635,79.248)
  Bottom Layer w0.5: v1(127.381,56.769) 132.371,56.769 132.482,56.88 v1(132.512,56.88)
IO19: U1.31 U4.6 U5.6 U7.6 | length 120
  Top Layer w0.254: U7.6 U7.6@127.082,36.574 ; v1@129.411,36.574 v1(129.476,36.639) ; 129.645,54.224 129.794,54.373
  Top Layer w0.5: U7.6@127.082,36.574 v1@129.411,36.574 ; U4.6 129.645,54.224 ; U5.6 129.291,76.703 129.794,76.2 129.794,54.373 v1(129.794,40.132)
  Bottom Layer w0.254: v1(56.134,78.486) 56.134,77.343 56.388,77.089 83.312,77.089 83.693,76.708 v1(127.635,76.708) ; v1(129.476,36.639) v1@129.476,36.736
  Bottom Layer w0.5: v1@129.476,36.736 129.794,37.053 v1(129.794,40.132)
IO21: U1.33 U8.19 U8.20 | length 55.6
  Top Layer w0.254: U1.33 53.614,75.895 53.975,75.534 v1(53.975,75.438) ; v1(99.568,67.056) 99.568,66.96 99.869,66.659 U8.19 U8.20
  Bottom Layer w0.254: v1(53.975,75.438) 91.186,75.438 v1(99.568,67.056)
IO22: U1.36 U8.18 | length 57.9
  Top Layer w0.254: U1.36 49.911,78.366 v1(49.911,75.311) ; v1(98.806,66.548) 99.169,66.185 U8.18
  Bottom Layer w0.254: v1(49.911,75.311) 50.8,74.422 90.932,74.422 v1(98.806,66.548)
IO23: U1.37 U4.5 U5.5 U7.5 | length 132.7
  Top Layer w0.254: U7.5 U7.5@127.082,37.844 ; v1@131.062,37.844 v1(131.064,37.846)
  Top Layer w0.5: U7.5@127.082,37.844 v1@131.062,37.844 ; U5.5 130.053,77.973 131.572,76.454 v1(131.572,55.499) 131.551,55.478 131.551,54.681 131.064,54.194 v1(131.064,40.513)
  Bottom Layer w0.254: v1(48.579,78.486) 48.579,79.694 48.844,79.959 65.71,79.959 67.691,77.978 v1(127.635,77.978)
  Bottom Layer w0.5: v1(127.508,55.499) v1(131.572,55.499) ; v1(131.064,37.846) v1(131.064,40.513)
IO25: SW3.1 SW3.2 U1.10 | length 60
  Top Layer w0.254: SW3.1@104.737,55.971 SW3.2@112.687,55.971
  Bottom Layer w0.254: v1(58.694,60.973) 58.694,61.996 60.325,63.627 83.566,63.627 86.36,60.833 102.489,60.833 104.14,59.182 104.14,56.136 v1(104.102,56.098)
IO26: SW5.1 SW5.2 U1.11 | length 46.9
  Top Layer w0.254: v1(93.434,56.098) SW5.2
  Bottom Layer w0.254: v1(59.964,60.973) 59.964,61.869 60.706,62.611 83.058,62.611 85.598,60.071 92.075,60.071 93.434,58.712 v1(93.434,56.098)
IO27: SW4.1 SW4.2 U1.12 | length 36.1
  Top Layer w0.254: v1(82.766,56.098) SW4.2
  Bottom Layer w0.254: v1(61.234,60.973) 61.234,61.742 61.468,61.976 82.55,61.976 82.766,61.76 v1(82.766,56.098)
IO32: U1.8
IO33: U1.9
IO34: U1.6
IO35: U1.7
NetANT1_1: ANT1.1 J3.1 | length 5
  Bottom Layer w0.254: ANT1.1@135.478,87.447 ANT1.1
  Bottom Layer w1: ANT1.1@135.478,87.447 J3.1
NetANT2_1: ANT2.1 J4.1 | length 5
  Bottom Layer w0.254: J4.1 J4.1@114.429,92.327
  Bottom Layer w1: ANT2.1 J4.1@114.429,92.327
NetANT3_1: ANT3.1 J5.1 | length 5.2
  Bottom Layer w0.254: ANT3.1@90.043,87.376 ANT3.1
  Bottom Layer w1: ANT3.1@90.043,87.376 J5.1
NetANT4_1: ANT4.1 J6.1 | length 5.1
  Bottom Layer w0.254: ANT4.1@70.708,87.447 ANT4.1
  Bottom Layer w1: ANT4.1@70.708,87.447 J6.1
NetBT1_P: BT1.P SW8.2 | length 8.2
  Bottom Layer w0.254: BT1.P@56.584,35.675 BT1.P
  Bottom Layer w1: SW8.2 BT1.P@56.584,35.675
NetC16_2: C16.2 C18.2 U8.28 | length 6.1
  Top Layer w0.254: U8.28 106.169,68.262 C18.2
  Top Layer w0.5: C18.2 C16.2
NetC20_1: C20.1 U8.27 | length 4.5
  Top Layer w0.254: C20.1 104.481,68.305 104.481,66.762 105.497,65.746 105.497,64.544 U8.27
NetC21_1: C21.1 R14.2 U8.11 U8.14 | length 10.8
  Top Layer w0.254: U8.11 94.269,66.548 ; R14.2 94.269,68.107 94.269,66.548 ; U8.14 96.369,66.191 96.012,66.548 94.269,66.548 ; C21.1@97.343,68.453 C21.1
  Top Layer w0.5: R14.2 C21.1@97.343,68.453
NetC22_1: C22.1 U8.2 | length 5
  Top Layer w0.254: C22.1 85.979,67.945 87.969,65.955 U8.2
NetC22_2: C22.2 U8.3 | length 7.9
  Top Layer w0.254: C22.2 87.188,70.546 87.63,70.104 87.63,67.31 88.669,66.271 U8.3
NetC23_1: C23.1 U8.4 | length 4.1
  Top Layer w0.254: U8.4 89.369,68.607 C23.1
NetC23_2: C23.2 U8.5 | length 7
  Top Layer w0.254: C23.2 89.469,70.485 90.148,70.485 90.464,70.169 90.464,66.461 90.069,66.066 U8.5
NetD1_A: D1.A R8.2 | length 4.5
  Top Layer w0.2: R8.2 89.662,36.957 90.043,37.338 D1.A
NetD2_A: D2.A R9.2 | length 12.2
  Top Layer w0.254: R9.2 86.741,32.004 88.392,33.655 88.392,37.846 89.789,39.243 D2.A
NetD3_k: D3.K R11.1 | length 10.3
  Top Layer w0.254: D3.K@80.391,42.794 D3.K@80.581,42.603
  Top Layer w0.5: D3.K@80.391,42.794 80.391,51.054 v1(80.391,52.832)
NetD4_k: D4.K R10.2 | length 14.1
  Top Layer w0.5: D4.K 78.105,43.434 79.121,44.45 79.121,49.042 79.121,53.975 80.137,54.991 v1(80.645,54.991)
NetQ1_1: Q1.1 R3.2 | length 2.8
  Top Layer w0.254: R3.2 84.836,41.402 Q1.1
NetQ2_1: Q2.1 R4.1 | length 2.8
  Top Layer w0.254: Q2.1 86.868,36.576 R4.1
NetR2_1: R2.1 U2.26 | length 4.3
  Top Layer w0.2: R2.1@92.586,41.283 U2.26
  Top Layer w0.254: R2.1 R2.1@92.586,41.283
NetR10_1: R10.1 U3.6 | length 3.1
  Bottom Layer w0.5: U3.6 76.835,54.483 77.343,54.991 R10.1
NetR11_2: R11.2 U3.7 | length 3.1
  Bottom Layer w0.5: U3.7 76.835,53.213 77.343,52.705 R11.2
NetR13_2: R13.2 U3.2 | length 3
  Bottom Layer w0.254: R13.2 69.215,52.959 69.469,53.213 U3.2
NetR15_1: R15.1 U8.26 | length 5.9
  Top Layer w0.254: R15.1 101.981,67.31 102.962,66.329 104.196,66.329 104.741,65.783 104.741,64.544 U8.26
RESET: C6.2 Q1.3 R1.1 SW1.1 SW1.2 U1.3 | length 53.4
  Bottom Layer w0.254: v1(46.863,49.856) SW1.1@46.988,49.856 ; 47.197,51.896 47.197,52.021 ; R1.1@57.725,49.856 R1.1 ; v1(60.96,49.911) C6.2@61.217,49.654
  Bottom Layer w1: v1(49.784,60.96) 49.784,54.483 47.197,51.896 46.863,51.562 v1(46.863,49.856) SW1.2 R1.1@57.725,49.856 ; R1.1 C6.2@60.899,49.916 ; v1(60.96,49.911) 64.262,46.609 72.146,46.609 72.908,45.847 v1(85.725,45.847)
RI: U2.2
RTS: Q1.2 R4.2 U2.24 | length 14.6
  Top Layer w0.2: 96.02,42.283 U2.24
  Top Layer w0.254: v1(86.614,43.815) 86.614,41.397 R4.2 ; v1(92.117,45) 93.303,45 96.02,42.283
  Bottom Layer w0.254: v1(86.614,43.815) 87.799,45 v1(92.117,45)
RX_0: D2.K R2.2 U1.34 | length 67.5
  Top Layer w0.254: v1(52.324,64.77) 52.344,64.79 U1.34 ; v1(89.789,49.149) D2.K R2.2
  Bottom Layer w0.254: v1(52.324,64.77) 63.5,53.594 63.5,51.689 66.04,49.149 v1(89.789,49.149)
TX_0: D1.K U1.35 U2.25 | length 78.3
  Top Layer w0.2: v1@51.054,64.135 v1(51.064,64.145) 51.074,64.155 U1.35 ; v1(94.488,42.164) 94.581,42.164 94.962,41.783 U2.25
  Bottom Layer w0.2: v1(51.064,64.145) 62.703,52.506 62.703,50.708 65.405,48.006 93.726,48.006 94.488,47.244 v1(94.488,42.164) 94.549,42.103 94.549,37.399 v1(94.61,37.338)
pads on no net: BT1. J1.A8 J1.B4_A9 J1.B8 SW8. SW8.EP U1.4 U1.5 U1.17 U1.18 U1.19 U1.20 U1.21 U1.22 U1.32 U1.40_1 U1.40_2 U1.40_3 U1.40_4 U1.40_5 U1.40_6 U1.40_7 U1.40_8 U1.40_9 U1.40_10 U1.40_11 U1.40_12 U2.9 U2.10 U2.11 U2.12 U2.13 U2.14 U2.15 U2.16 U2.17 U2.18 U2.19 U2.20 U2.21 U2.22 U3.1 U3.9 U4.7 U5.7 U7.7

## Polygon pours and split planes (outlines as drawn)
GND on Top Layer "GND_L01_P001" (solid, pour order 1): 146.431,94.361 146.431,25.4 45.593,25.4 45.593,94.361
GND on Bottom Layer "GND_L02_P000" (solid, pour order 0): 45.593,25.4 45.593,94.361 45.72,94.361 146.431,94.361 146.431,25.4

## Other copper
Top Layer:

## Text inside footprints (layer, text, board x,y; h text height)
D3: Mechanical 13 "ANT" at 138.773,81.978 h1.52
J1: Mechanical 13 "PCB EDGE" at 104.899,26.37 h0.61
J3: Mechanical 13 "PCB EDGE" at 139.782,94.104 h0.61 r180
J4: Mechanical 13 "PCB EDGE" at 118.604,94.158 h0.61 r180
J5: Mechanical 13 "PCB EDGE" at 94.347,94.158 h0.61 r180
J6: Mechanical 13 "PCB EDGE" at 75.012,94.231 h0.61 r180
U4: Top Overlay "GT24MINI" at 133.733,55.134 h1.5; Top Overlay "GND" at 129.033,51.329 h0.6; Top Overlay "IRQ" at 129.033,52.629 h0.6; Top Overlay "MISI" at 129.033,53.929 h0.6; Top Overlay "MOSI" at 129.033,55.129 h0.6; Top Overlay "SCK" at 129.033,56.429 h0.6; Top Overlay "CSN" at 129.033,57.729 h0.6; Top Overlay "CE" at 129.033,59.029 h0.6; Top Overlay "VCC" at 129.033,60.329 h0.6
U5: Top Overlay "GT24MINI" at 133.987,77.613 h1.5; Top Overlay "GND" at 129.287,73.808 h0.6; Top Overlay "IRQ" at 129.287,75.108 h0.6; Top Overlay "MISI" at 129.287,76.408 h0.6; Top Overlay "MOSI" at 129.287,77.608 h0.6; Top Overlay "SCK" at 129.287,78.908 h0.6; Top Overlay "CSN" at 129.287,80.208 h0.6; Top Overlay "CE" at 129.287,81.508 h0.6; Top Overlay "VCC" at 129.287,82.808 h0.6
U7: Top Overlay "GT24MINI" at 133.479,37.481 h1.5; Top Overlay "GND" at 128.779,33.676 h0.6; Top Overlay "IRQ" at 128.779,34.976 h0.6; Top Overlay "MISI" at 128.779,36.276 h0.6; Top Overlay "MOSI" at 128.722,37.533 h0.6; Top Overlay "SCK" at 128.779,38.776 h0.6; Top Overlay "CSN" at 128.779,40.076 h0.6; Top Overlay "CE" at 128.779,41.376 h0.6; Top Overlay "VCC" at 128.779,42.676 h0.6
U8: Top Overlay "30" at 106.919,66.016 h0.8; Top Overlay "1" at 86.919,66.016 h0.8